# Altium PCB master_pcb.PcbDoc
Units mil, origin at the board's own origin, x right, y up, seen from the top; angles counter-clockwise.
Board outline 6000 x 4000 mil, 2 copper layers (Top Layer, Bottom Layer); 59 components, 0 nets, 299 pads, 45 vias.
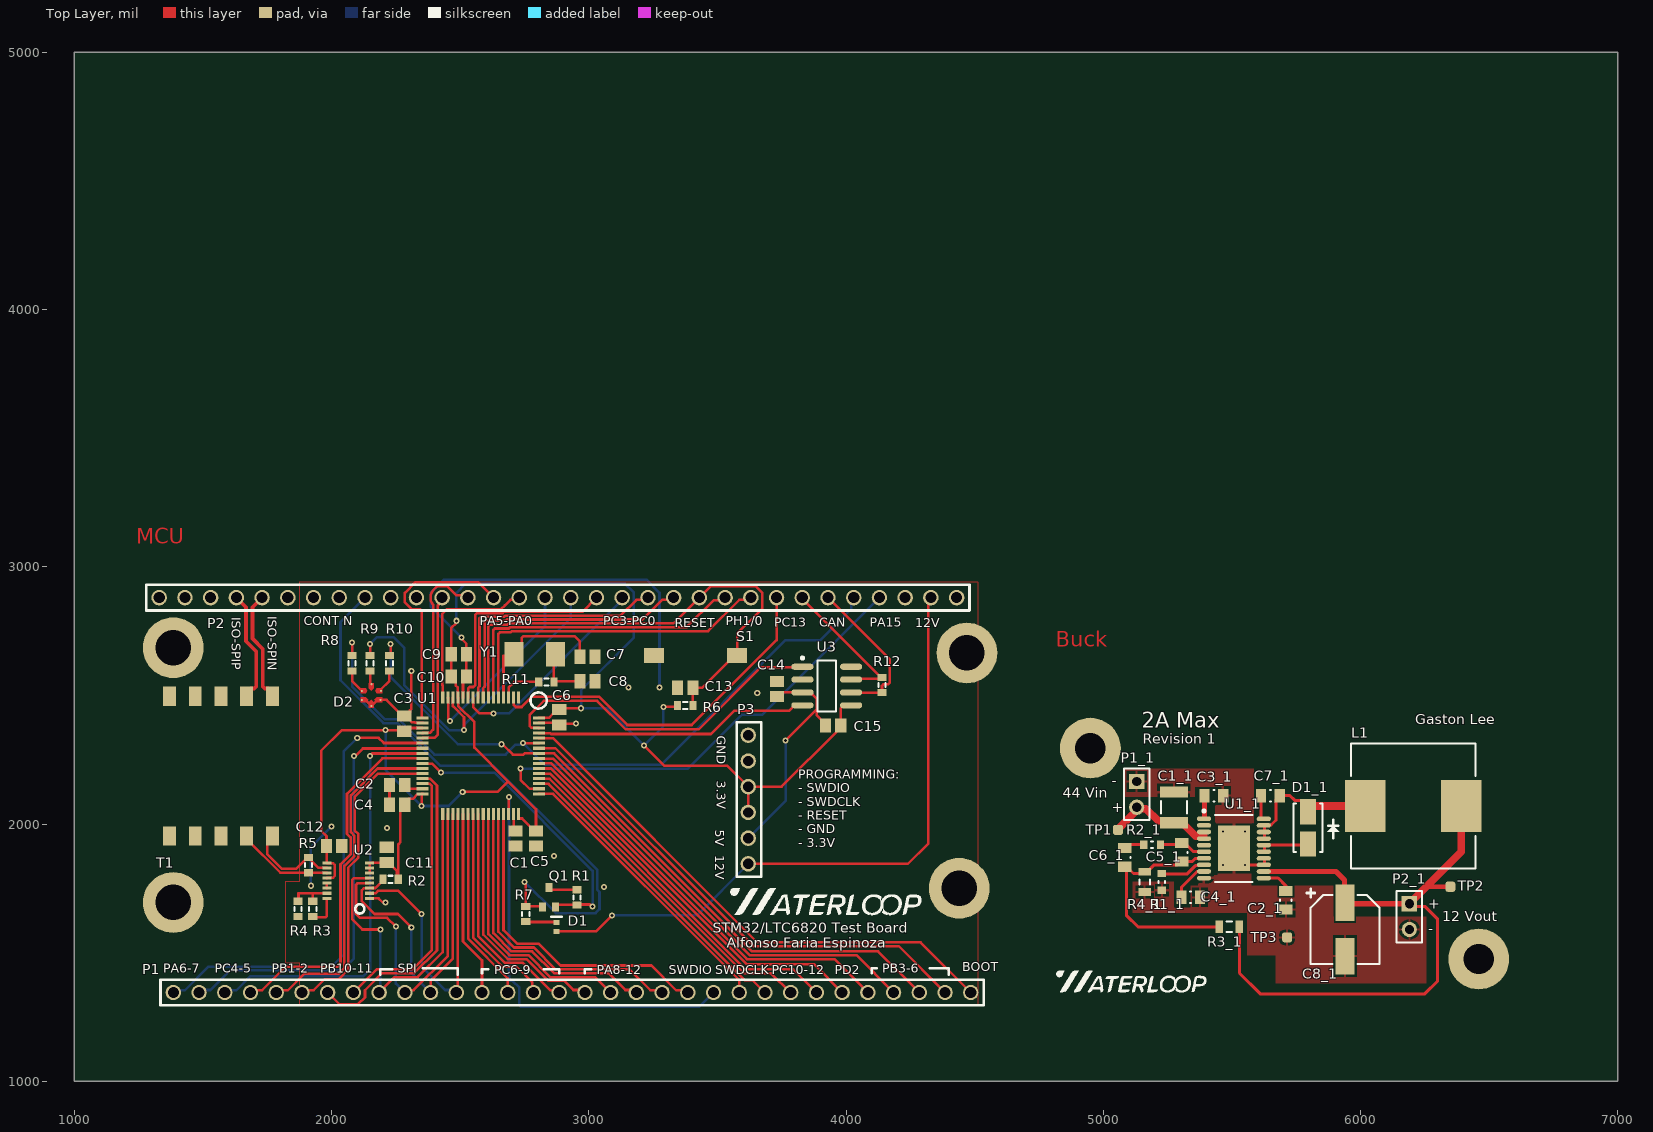
[diagram p0: Top Layer view]
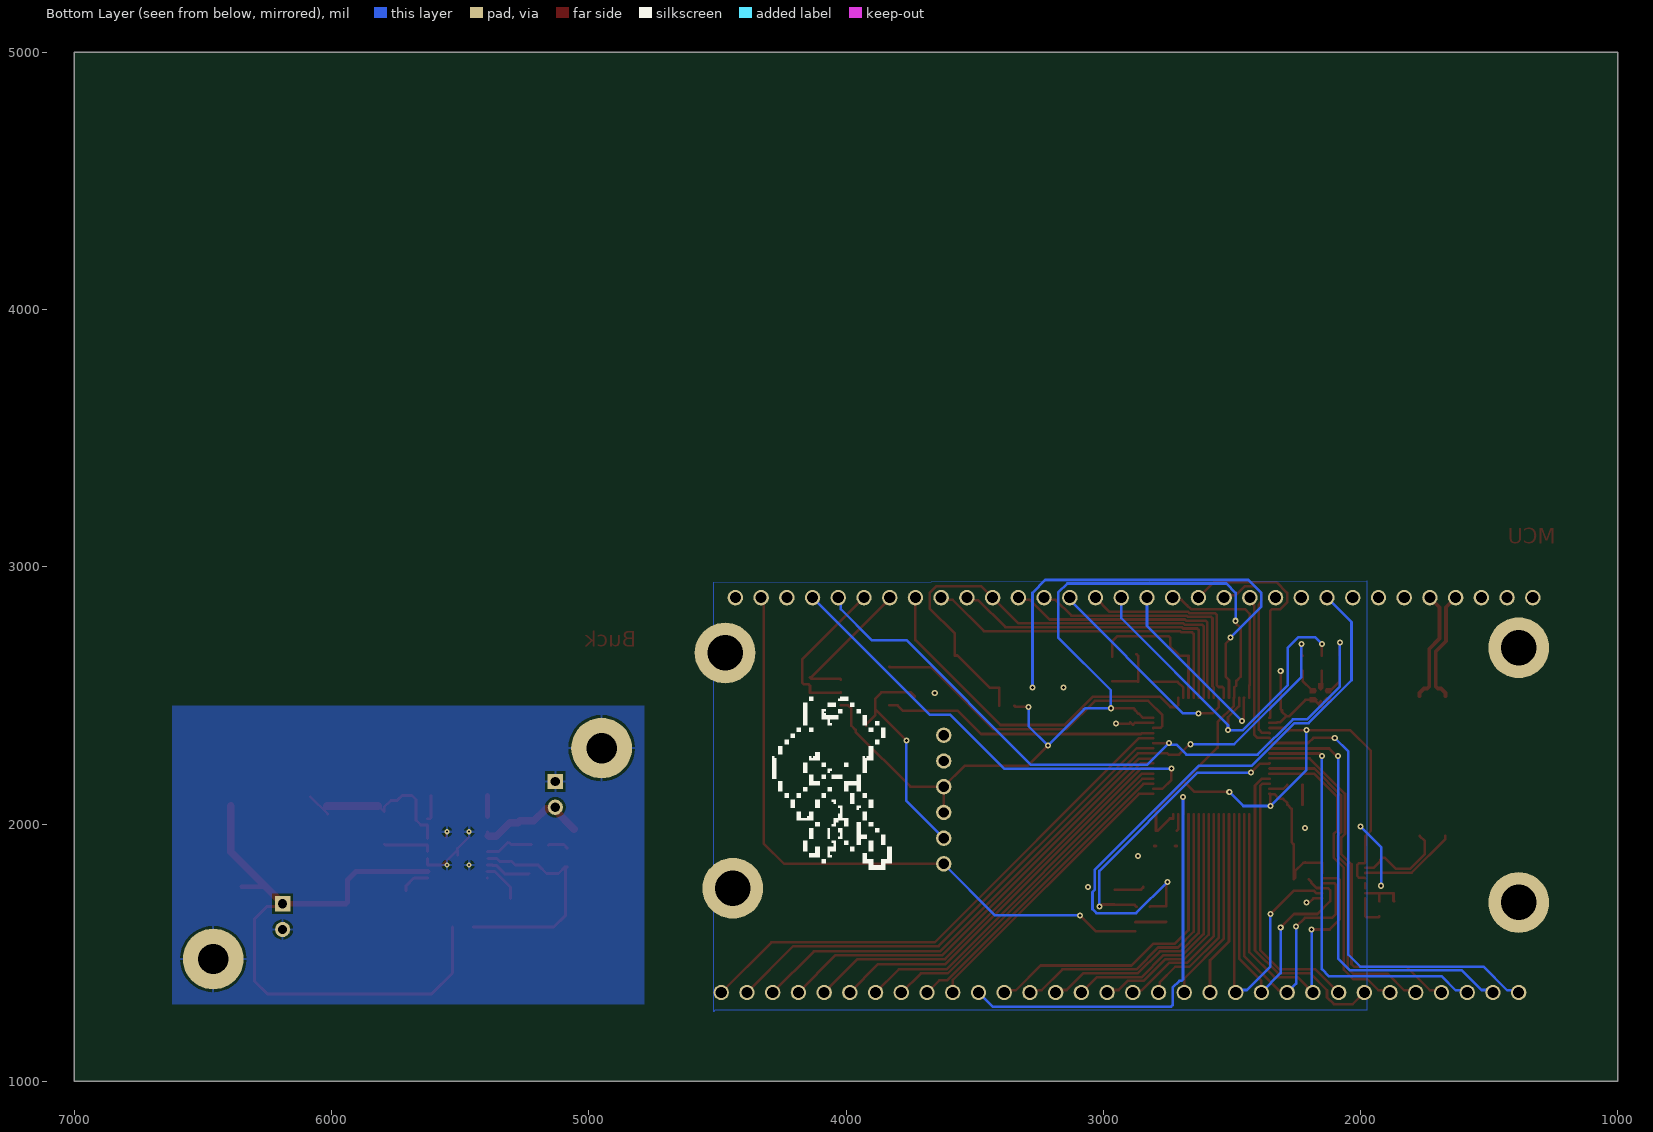
[diagram p1: Bottom Layer view, seen from below]

## Layer stack, top to bottom
Top Solder: solder mask 0.4, Solder Resist, Dk 3.5
Top Layer: signal copper 1.4
Dielectric 1: dielectric 12.6, FR-4, Dk 4.8
Bottom Layer: signal copper 1.4
Bottom Solder: solder mask 0.4, Solder Resist, Dk 3.5

## Board outline
1000,1000 7000,1000 7000,5000 1000,5000

## Design rules (kind name [scope] priority, off if disabled: settings)
Clearance [All] p1: gap=10 ignorepadtopadclearanceinfootprint=FALSE except(0: Arc-Hole Track-Hole SMDPad-Hole THPad-Hole Via-Hole Fill-Hole Poly-Hole Region-Hole Text-Hole)
PolygonConnect [All] p1: connectstyle=Relief reliefconductorwidth=10 reliefentries=4 polygonreliefangle="90 Angle" airgapwidth=10
RoomDefinition Buck_Schematic [InComponentClass('Buck_Schematic')] p1: confinementstyle=ConfineIn formatcopy=TRUE lockcomponents=FALSE outline 4775,1305 6630,1305 6630,2470 4775,2470
RoutingVias [All] p1: holewidth=28 width=50 viastyle="Through Hole" minholewidth=28 minwidth=50 maxholewidth=28 maxwidth=50
SolderMaskExpansion [All] p1: expansion=4 istentingtop=FALSE
Width [All] p1: maxlimit=10 minlimit=10 preferedwidth=10
30 further rules are at their usual default settings.

## Components (designator, comment, footprint, x,y, rotation, side; value= is the part's Value field where it differs from the comment)
C1 "10V" C0805 2715,1943.9 r90 top value=2.2uF
C1_1 "Cin" "1210 - Capacitor" 5275,2065 r270 top value=2.2uF (schematic designator C1)
C2 "10V" C0805 2255,2151.94 r0 top value=2.2uF
C2_1 "Css" "0805 - Capacitor" 5710,1703.58 r90 top value=10nF (schematic designator C2)
C3 "10V" C0805 2282.53,2390 r90 top value=100nF
C3_1 "Cbyp" "0805 - Capacitor" 5430,2110 r180 top value=100nF (schematic designator C3)
C4 "10V" C0805 2255,2075 r180 top value=100nF
C4_1 "Cramp" "0805 - Capacitor" 5340,1715 r180 top value=690pF (schematic designator C4)
C5 "10V" C0805 2795,1943.9 r270 top value=100nF
C5_1 "Ccomp2" "0805 - Capacitor" 5305,1890 r90 top value=51pF (schematic designator C5)
C6 "10V" C0805 2885,2415 r270 top value=100nF
C6_1 "Ccomp1" "0805 - Capacitor" 5083.53,1870 r90 top value=2.7nF (schematic designator C6)
C7 "50V" C0805 2995,2650 r180 top value=4pF
C7_1 "Cboot" "0805 - Capacitor" 5650,2110 r180 top value=22nF (schematic designator C7)
C8 "50V" C0805 2995,2555 r180 top value=4pF
C8_1 "Cout" "OCVZ0606 - CAPACITOR" 5940,1590 r270 top value=39uF (schematic designator C8)
C9 "10V" C0805 2495,2660 r0 top value=10nF
C10 "10V" C0805 2495,2573.06 r180 top value=1uF
C11 "10V" C0805 2215,1880 r90 top value=10nF
C12 "10V" C0805 2010,1915 r0 top value=10nF
C13 "10V" C0805 3375,2530 r180 top value=100nF
C14 "10V" C0805 3732.23,2525.07 r90 top value=100nF
C15 "10V" C0805 3950,2382.75 r180 top value=100nF
D1 "SMLP13BC8TT86" SMLP13BC8TT86 2875,1600 r0 top
D1_1 "Diode - Schottky" "SMA - DIODE" 5795.84,1985 r90 top (schematic designator D1)
D2 "CL-340T-SD-T" CL-340T-SD-T 2155,2500 r0 top
L1 "Inductor" "MSS1210 - INDUCTOR" 6205,2070 r0 top value=68uH
P1 "61303211121" 61303211121 1385,1345 r0 top
P1_1 "1x2 Header" HDR1X2 5130.11,2165 r270 top (schematic designator P1)
P2 "61303211121" 61303211121 1330,2880 r0 top
P2_1 "1x2 Header" HDR1X2 6190,1690 r270 top (schematic designator P2)
P3 "PH1-06-UA" PH1-06-UA 3620,2345 r270 top
Q1 "NVS4409NT1G" NVS4409NT1G 2845,1715 r180 top
R1 "5%" J1-0603 2955,1715 r270 top value=10K
R1_1 "Rt" "0603 - Resistor" 5228.06,1775 r90 top value=20.5k (schematic designator R1)
R2 "1%" J1-0603 2230,1785 r0 top value=3k
R2_1 "Rcomp" "0603 - Resistor" 5190,1920 r0 top value=21.5k (schematic designator R2)
R3 "1%" J1-0603 1926.95,1670 r90 top value=3K
R3_1 "Rfb2" "0805 - Resistor" 5490,1600 r0 top value=8.87k (schematic designator R3)
R4 "1%" J1-0603 1869.7,1670 r270 top value=1K
R4_1 "Rfb1" "0805 - Resistor" 5160.96,1775 r90 top value=1.02k (schematic designator R4)
R5 "1%" J1-0603 1910,1840 r90 top value=120
R6 "5%" J1-0603 3375,2460 r180 top value=10K
R7 "5%" J1-0603 2755,1650 r270 top value=2K
R8 "1%" J1-0603 2080,2625 r90 top value=120R
R9 "1%" J1-0603 2150,2625 r90 top value=120R
R10 "1%" J1-0603 2225,2625 r90 top value=120R
R11 "0603" J1-0603 2835,2552.63 r0 top value=0
R12 "1%" J1-0603 4140,2540 r90 top value=120R
S1 "PTS636 SM43 SMTR LFS" "PTS636 SM43 SMTR LFS" 3415,2655 r180 top
T1 "HM2100NLT" HM2100NLT 1570,2225 r0 top
TP1 "Test Point" "Test Point"#1 5057.37,1977.37 r90 top
TP2 "Test Point" "Test Point"#2 6310,1715 r90 top
TP3 "Test Point" "Test Point"#1 5715,1559.33 r90 top
U1 "STM32F405RGT6TR" STM32F405RGT6TR 2580,2265 r180 top
U1_1 "LM5005" LM5005 5508.06,1905 r0 top (schematic designator U1)
U2 "LTC6820" LTC6820 2065,1780 r90 top
U3 "TJA1051T/3/CM,118" SO8_N 3925.31,2536.46 r0 top
Y1 "CX5032GB08000H0HPQZ1" CX5032GB08000H0HPQZ1 2790,2660 r180 top

## Footprints (in the part's own frame and the unit in brackets; to place one, negate y for a bottom-side part, rotate by r counter-clockwise, add the part's x,y. Pads: shape width x height; smd on the part's side, far side on the other; paste and mask are expansions set on the pad)
"0603 - Resistor" [mm] "0603 Chip Resistor - IPC Medium Density"
  rect 0.7x0.85 smd: 1(-0.825,0) 2(0.825,0)
  silkscreen extent -0.1,-0.33 0.1,0.33, body extent -0.8,-0.4 0.8,0.4, height 0.45
"0805 - Capacitor" [mm] "0805 Chip Capacitor - IPC Medium Density"
  rect 1x1.35 smd: 1(-0.925,0) 2(0.925,0)
  silkscreen extent -0.05,-0.58 0.05,0.58, body extent -1,-0.6 1,0.6, height 1.2
"0805 - Resistor" [mm] "0805 Chip Resistor - IPC Medium Density"
  rect 0.75x1.25 smd: 1(-1,0) 2(1,0)
  silkscreen extent -0.25,-0.53 0.25,0.53, body extent -1,-0.6 1,0.6, height 0.5
"1210 - Capacitor" [mm] "1210 Chip Capacitor - IPC Medium Density"
  rect 1.1x2.75 smd: 1(-1.525,0) 2(1.525,0)
  silkscreen extent -0.6,-1.27 0.6,1.28, body extent -1.65,-1.3 1.65,1.3, height 1.6
61303211121 [mil]
  round 60 hole 43.31: 1(0,0) 2(100,0) 3(200,0) 4(300,0) 5(400,0) 6(500,0) 7(600,0) 8(700,0) 9(800,0) 10(900,0) 11(1000,0) 12(1100,0) 13(1200,0) 14(1300,0) 15(1400,0) 16(1500,0) 17(1600,0) 18(1700,0) 19(1800,0) 20(1900,0) 21(2000,0) 22(2100,0) 23(2200,0) 24(2300,0) 25(2400,0) 26(2500,0) 27(2600,0) 28(2700,0) 29(2800,0) 30(2900,0) 31(3000,0) 32(3100,0)
  silkscreen extent -50,-50 3150,50
C0805 [mm] "Chip Capacitor, Body 2.0x1.3mm, IPC High Density"
  rect 1.1x1.4 smd: 1(-0.75,0) 2(0.75,0)
  body extent -1.1,-0.72 1.1,0.72, height 1.4
CL-340T-SD-T [mm]
  round 0.2 smd: 1(-0.95,0.45) 2(0,1.1) 3(0.95,0.45) 4(0.9,-0.45) 5(0,-1.05) 6(-0.95,-0.45)
  Top Layer region: 0.25,1.2 0.25,0.7 0,0.45 -0.25,0.7 -0.25,1.2
  Top Layer region: -0.25,-1.2 -0.25,-0.7 0,-0.45 0.25,-0.7 0.25,-1.2
  Top Layer region: -1.05,-0.2 -0.55,-0.2 -0.3,-0.45 -0.55,-0.7 -1.05,-0.7
  Top Layer region: 1.05,-0.7 0.55,-0.7 0.3,-0.45 0.55,-0.2 1.05,-0.2
  Top Layer region: -1.05,0.7 -0.55,0.7 -0.4,0.45 -0.55,0.2 -1.05,0.2
  Top Layer region: 1.05,0.2 0.55,0.2 0.4,0.45 0.55,0.7 1.05,0.7
  body extent -0.75,-0.8 0.65,0.9, height 0.35
CX5032GB08000H0HPQZ1 [mm]
  rect 1.9x2.4 smd: 1(-2.05,0) 2(2.05,0)
  body extent -2.5,-1.6 2.5,1.6, height 1.1
HDR1X2 [mm] "Connector; Header; 2 Position"
  rect 1.5x1.5 hole 0.9: 1(0,0)
  round 1.5 hole 0.9: 2(2.54,0)
  silkscreen extent -1.27,-1.27 3.81,1.27, body extent -1.27,-1.27 3.81,1.27, height 8.54
HM2100NLT [mm]
  rect 1.27x1.89 smd: 1(-5.08,-6.895) 2(-2.54,-6.895) 3(0,-6.895) 4(2.54,-6.895) 5(5.08,-6.895) 6(5.08,6.895) 7(2.54,6.895) 8(0,6.895) 9(-2.54,6.895) 10(-5.08,6.895)
  body extent -7.37,-5.84 7.37,5.84, height 3.45
J1-0603 [mm] "Chip Resistor, Body 1.6x0.8mm, IPC High Density"
  rect 0.7x0.9 smd: 1(-0.75,0) 2(0.75,0)
  silkscreen extent -0.2,-0.35 0.2,0.35, body extent -0.85,-0.48 0.85,0.48, height 0.9
LM5005 [mm] "20-PowerTSSOP (0.173\"\", 4.40mm Width)"
  oval 1.4x0.45 smd: 1(-2.95,2.925) 2(-2.95,2.275) 3(-2.95,1.625) 4(-2.95,0.975) 5(-2.95,0.325) 6(-2.95,-0.325) 7(-2.95,-0.975) 8(-2.95,-1.625) 9(-2.95,-2.275) 10(-2.95,-2.925) 11(2.95,-2.925) 12(2.95,-2.275) 13(2.95,-1.625) 14(2.95,-0.975) 15(2.95,-0.325) 16(2.95,0.325) 17(2.95,0.975) 18(2.95,1.625) 19(2.95,2.275) 20(2.95,2.925)
  rect 3.15x4.5 smd: 21(0,0)
  silkscreen extent -3.07,-3.3 1.85,3.82, body extent -3.2,-3.3 3.2,3.3, height 1.1
LTC6820 [mm]
  rect 0.305x0.889 smd: 1(-1.75,-2.106) 2(-1.25,-2.106) 3(-0.75,-2.106) 4(-0.25,-2.106) 5(0.25,-2.106) 6(0.75,-2.106) 7(1.25,-2.106) 8(1.75,-2.106) 9(1.75,2.106) 10(1.25,2.106) 11(0.75,2.106) 12(0.25,2.106) 13(-0.25,2.106) 14(-0.75,2.106) 15(-1.25,2.106) 16(-1.75,2.106)
  silkscreen extent -3.25,-1.6 -2.34,-0.69, body extent -2.03,-1.52 2.03,1.52, height 1.1
"MSS1210 - INDUCTOR" [mm] "Precision Wire Wound Inductor, 2-Leads, Body 12.00x12.00mm, IPC Medium Density"
  rect 4x5.1 smd: 1(-4.75,0) 2(4.75,0)
  silkscreen extent -6.15,-6.15 6.15,6.15, body extent -6.15,-6.15 6.15,6.15, height 10.16
NVS4409NT1G [mm]
  rect 0.7x0.9 smd: 1(0.65,0.95) 2(-0.65,0.95) 3(0,-0.95)
  body extent -1.05,-0.62 1.05,0.62, height 0.9
"OCVZ0606 - CAPACITOR" [mm] "Aluminum Electrolytic Capacitor, Body 6.60x6.60x6.00mm, IPC Low Density"
  rect 3.6x1.85 smd: 1(-2.625,0) 2(2.625,0)
  silkscreen extent -4,-3.8 3.4,3.4, body extent -3.6,-3.4 3.6,3.4, height 6
PH1-06-UA [mil]
  round 60 hole 40.16: 1(0,0) 2(100,0) 3(200,0) 4(300,0) 5(400,0) 6(500,0)
  silkscreen extent -50,-45 550,50
"PTS636 SM43 SMTR LFS" [mm]
  rect 2x1.5 smd: 1(-4.1,0) 2(4.1,0)
  body extent -3,-1.75 3,1.75, height 4.3
"SMA - DIODE" [mm] "Molded Diode, 2-Leads, Body 4.38x2.63mm, IPC Medium Density"
  rect 2.5x1.6 smd: 1(-1.6,0) 2(1.6,0)
  silkscreen extent -2.4,-3.1 2.4,1.45, body extent -2.6,-1.43 2.6,1.43, height 2.95
SMLP13BC8TT86 [mm]
  rect 0.6x0.5 smd: 1(0,-0.45) 2(0,0.45)
  silkscreen extent -0.51,1.02 0.51,1.02, body extent -0.3,-0.5 0.3,0.5, height 0.2
SO8_N [mm] "SOIC, 8-Leads, Body 4.9x3.9mm, Pitch 1.27mm, IPC Medium Density"
  oval 2.2x0.6 smd: 1(-2.4,1.905) 2(-2.4,0.635) 3(-2.4,-0.635) 4(-2.4,-1.905) 5(2.4,-1.905) 6(2.4,-0.635) 7(2.4,0.635) 8(2.4,1.905)
  silkscreen extent -2.52,-2.5 0.9,2.88, body extent -2,-2.5 2,2.5, height 1.75
STM32F405RGT6TR [mm]
  rect 0.3x1.2 smd: 1(-3.75,-5.75) 2(-3.25,-5.75) 3(-2.75,-5.75) 4(-2.25,-5.75) 5(-1.75,-5.75) 6(-1.25,-5.75) 7(-0.75,-5.75) 8(-0.25,-5.75) 9(0.25,-5.75) 10(0.75,-5.75) 11(1.25,-5.75) 12(1.75,-5.75) 13(2.25,-5.75) 14(2.75,-5.75) 15(3.25,-5.75) 16(3.75,-5.75) 33(3.75,5.75) 34(3.25,5.75) 35(2.75,5.75) 36(2.25,5.75) 37(1.75,5.75) 38(1.25,5.75) 39(0.75,5.75) 40(0.25,5.75) 41(-0.25,5.75) 42(-0.75,5.75) 43(-1.25,5.75) 44(-1.75,5.75) 45(-2.25,5.75) 46(-2.75,5.75) 47(-3.25,5.75) 48(-3.75,5.75)
  rect 1.2x0.3 smd: 17(5.75,-3.75) 18(5.75,-3.25) 19(5.75,-2.75) 20(5.75,-2.25) 21(5.75,-1.75) 22(5.75,-1.25) 23(5.75,-0.75) 24(5.75,-0.25) 25(5.75,0.25) 26(5.75,0.75) 27(5.75,1.25) 28(5.75,1.75) 29(5.75,2.25) 30(5.75,2.75) 31(5.75,3.25) 32(5.75,3.75) 49(-5.75,3.75) 50(-5.75,3.25) 51(-5.75,2.75) 52(-5.75,2.25) 53(-5.75,1.75) 54(-5.75,1.25) 55(-5.75,0.75) 56(-5.75,0.25) 57(-5.75,-0.25) 58(-5.75,-0.75) 59(-5.75,-1.25) 60(-5.75,-1.75) 61(-5.75,-2.25) 62(-5.75,-2.75) 63(-5.75,-3.25) 64(-5.75,-3.75)
  silkscreen extent -6.52,-6.26 -4.92,-4.66, body extent -4.83,-4.89 4.83,4.89, height 1.6
"Test Point"#1 [mm] "Test Point"
  rrect50% 1x1 smd: TP?(0,0)
"Test Point"#2 [mm] "Test Point"
  rrect50% 1x1 smd: TP?(1.046,-1)

## Part data
C1 C2: library part Cap, "C0805C225K8RACAUTO. 2.2µF ±10% 10V Ceramic Capacitor X7R 0805 (2012 Metric)", LatestRevisionDate=17-Jul-2002, LatestRevisionNote="Re-released for DXP Platform.", PackageDescription="Radial Cap, Thru-Hole; 2 Leads; 0.3 in Pin Spacing", PackageReference=RAD-0.3, Published=8-Jun-2000, Publisher="Altium Limited"
C1_1: library part "Capacitor - Nonpolarized", "Nonpolarized Capacitor", Supplier Part Number 1=445-4497-1-ND, Supplier 1=Digi-Key
C2_1: library part "Capacitor - Nonpolarized", "Nonpolarized Capacitor", Supplier Part Number 1=311-1475-1-ND, Supplier 1=Digi-Key
C3 C4 C5 C6 C13 C14 C15: library part Cap, "C0805C104K8RACTU. 0.1µF ±10% 10V Ceramic Capacitor X7R 0805 (2012 Metric)", LatestRevisionDate=17-Jul-2002, LatestRevisionNote="Re-released for DXP Platform.", PackageDescription="Radial Cap, Thru-Hole; 2 Leads; 0.3 in Pin Spacing", PackageReference=RAD-0.3, Published=8-Jun-2000, Publisher="Altium Limited"
C3_1: library part "Capacitor - Nonpolarized", "Nonpolarized Capacitor", Supplier Part Number 1=311-2083-1-ND, Supplier 1=Digi-Key
C4_1: library part "Capacitor - Nonpolarized", "Nonpolarized Capacitor", Supplier Part Number 1=311-4308-1-ND, Supplier 1=Digi-Key
C5_1 C6_1: library part "Capacitor - Nonpolarized", "Nonpolarized Capacitor", Supplier Part Number 1=311-1130-1-ND, Supplier 1=Digi-Key
C7: library part Cap, "CBR08C409B5GAC. 4pF ±0.1pF 50V Ceramic Capacitor C0G, NP0 0805 (2012 Metric)", LatestRevisionDate=17-Jul-2002, LatestRevisionNote="Re-released for DXP Platform.", PackageDescription="Radial Cap, Thru-Hole; 2 Leads; 0.3 in Pin Spacing", PackageReference=RAD-0.3, Published=8-Jun-2000, Publisher="Altium Limited"
C7_1: library part "Capacitor - Nonpolarized", "Nonpolarized Capacitor", Supplier Part Number 1=311-1905-1-ND, Supplier 1=Digi-Key
C8: library part Cap, "CBR08C409B5GAC", LatestRevisionDate=17-Jul-2002, LatestRevisionNote="Re-released for DXP Platform.", PackageDescription="Radial Cap, Thru-Hole; 2 Leads; 0.3 in Pin Spacing", PackageReference=RAD-0.3, Published=8-Jun-2000, Publisher="Altium Limited"
C8_1: library part "Capacitor - Polarized", "Polarized Capacitor", Supplier Part Number 1=PCE3804CT-ND, Supplier 1=Digi-Key
C9 C11 C12: library part Cap, "C0805C103K8RAC7800. 10000pF ±10% 10V Ceramic Capacitor X7R 0805 (2012 Metric)", LatestRevisionDate=17-Jul-2002, LatestRevisionNote="Re-released for DXP Platform.", PackageDescription="Radial Cap, Thru-Hole; 2 Leads; 0.3 in Pin Spacing", PackageReference=RAD-0.3, Published=8-Jun-2000, Publisher="Altium Limited"
C10: library part Cap, "CL21B105KPFNNNE. 1µF ±10% 10V Ceramic Capacitor X7R 0805 (2012 Metric)", LatestRevisionDate=17-Jul-2002, LatestRevisionNote="Re-released for DXP Platform.", PackageDescription="Radial Cap, Thru-Hole; 2 Leads; 0.3 in Pin Spacing", PackageReference=RAD-0.3, Published=8-Jun-2000, Publisher="Altium Limited"
D1: library part LED2, "Blue 470nm LED Indication - Discrete 2.9V 2-SMD, No Lead", LatestRevisionDate=17-Jul-2002, LatestRevisionNote="Re-released for DXP Platform.", PackageDescription="SM LED; 2 Flat Leads", PackageReference=3.2X1.6X1.1, PackageVersion=Feb-2002, Published=8-Jun-2000, Publisher="Altium Limited"
D1_1: "Schottky Rectifier", Manufacturer Part Number=SK220ATR, Supplier Part Number 1=1655-2135-1-ND, ComponentLink1Description="Manufacturer Link", ComponentLink1URL=http://www.irf.com/, ComponentLink2Description=Datasheet, ComponentLink2URL=http://www.irf.com/product-info/datasheets/data/10tq.pdf, Supplier 1=Digi-Key
L1: Supplier Part Number 1=994-MSS1210-683MEB, Supplier 1=Mouser
P1_1 P2_1: "1x2 Pin Header"
P3: library part "Header 6", "Connector Header Through Hole 6 position 0.100\" (2.54mm)", LatestRevisionDate=17-Jul-2002, LatestRevisionNote="Re-released for DXP Platform.", Publisher="Altium Limited"
Q1: library part MOSFET-N, "N-Channel 25V 700mA (Ta) 280mW (Tj) Surface Mount SC-70-3 (SOT323)", LatestRevisionDate=17-Jul-2002, LatestRevisionNote="Re-released for DXP Platform.", PackageDescription="TO, Flat Index; 3 In-Line, Axial Leads; Body Dia. 4.6mm; Lead Dia. 0.5 mm (max)", PackageReference=E3, PackageVersion=1995/1996, Published=8-Jun-2000, Publisher="Altium Limited"
R1 R6: library part Res1, "ERJ-3GEYJ103V. 10 kOhms ±5% 0.1W, 1/10W Chip Resistor 0603 (1608 Metric) Automotive AEC-Q200 Thick Film", LatestRevisionDate=17-Jul-2002, LatestRevisionNote="Re-released for DXP Platform.", PackageDescription="Axial Device, Thru-Hole; 2 Leads; 0.3 in Pin Spacing", PackageReference=AXIAL-0.3, Published=8-Jun-2000, Publisher="Altium Limited"
R1_1: library part Resistor, "Resistor", Supplier Part Number 1=541-20.5KHCT-ND, Supplier 1=Digi-Key
R2 R3: library part Res1, "RMCF0603FT3K00. 3 kOhms ±1% 0.1W, 1/10W Chip Resistor 0603 (1608 Metric) Automotive AEC-Q200 Thick Film", LatestRevisionDate=17-Jul-2002, LatestRevisionNote="Re-released for DXP Platform.", PackageDescription="Axial Device, Thru-Hole; 2 Leads; 0.3 in Pin Spacing", PackageReference=AXIAL-0.3, Published=8-Jun-2000, Publisher="Altium Limited"
R2_1: library part Resistor, "Resistor", Supplier Part Number 1=541-21.5KHCT-ND, Supplier 1=Digi-Key
R3_1: library part Resistor, "Resistor", Supplier Part Number 1=P8.87KCCT-ND, Supplier 1=Digi-Key
R4: library part Res1, "RC0603FR-071KL .1 kOhms ±1% 0.1W, 1/10W Chip Resistor 0603 (1608 Metric) Moisture Resistant Thick Film", LatestRevisionDate=17-Jul-2002, LatestRevisionNote="Re-released for DXP Platform.", PackageDescription="Axial Device, Thru-Hole; 2 Leads; 0.3 in Pin Spacing", PackageReference=AXIAL-0.3, Published=8-Jun-2000, Publisher="Altium Limited"
R4_1: library part Resistor, "Resistor", Supplier Part Number 1=P1.02KCCT-ND, Supplier 1=Digi-Key
R5 R8 R9 R10 R12: library part Res1, "RC0603FR-07120RL. 120 Ohms ±1% 0.1W, 1/10W Chip Resistor 0603 (1608 Metric) Moisture Resistant Thick Film", LatestRevisionDate=17-Jul-2002, LatestRevisionNote="Re-released for DXP Platform.", PackageDescription="Axial Device, Thru-Hole; 2 Leads; 0.3 in Pin Spacing", PackageReference=AXIAL-0.3, Published=8-Jun-2000, Publisher="Altium Limited"
R7: library part Res1, "ERJ-PA3J202V. 2 kOhms ±5% 0.25W, 1/4W Chip Resistor 0603 (1608 Metric) Automotive AEC-Q200, Pulse Withstanding Thick Film", LatestRevisionDate=17-Jul-2002, LatestRevisionNote="Re-released for DXP Platform.", PackageDescription="Axial Device, Thru-Hole; 2 Leads; 0.3 in Pin Spacing", PackageReference=AXIAL-0.3, Published=8-Jun-2000, Publisher="Altium Limited"
R11: library part Res1, "ERJ-U030R00V. 0 Ohms Jumper 0.1W, 1/10W Chip Resistor 0603 (1608 Metric) Anti-Sulfur, Automotive AEC-Q200 Thick Film", LatestRevisionDate=17-Jul-2002, LatestRevisionNote="Re-released for DXP Platform.", PackageDescription="Axial Device, Thru-Hole; 2 Leads; 0.3 in Pin Spacing", PackageReference=AXIAL-0.3, Published=8-Jun-2000, Publisher="Altium Limited"
S1: library part SW-PB, "Tactile Switch SPST-NO Top Actuated Surface Mount", LatestRevisionDate=17-Jul-2002, LatestRevisionNote="Re-released for DXP Platform.", PackageDescription="Switch; 2 Leads", PackageReference=SPST-2, Published=24-Mar-1999, Publisher="Altium Limited"
U1_1: "7V to 75V 2.5A, Buck Converter", Manufacturer="Texas Instruments", Manufacturer Part Number=LM5005MHX/NOPB, Supplier Part Number=926-LM5005MHX/NOPB, Supplier Part Number 1=LM5005MHX/NOPBCT-ND, Datasheet=https://www.ti.com/lit/ds/symlink/lm5005.pdf?HQS=TI-null-null-digikeymode-df-pf-null-wwe&ts=1606456124909, Supplier=Mouser, Supplier 1=Digi-Key
U3: library part TJA1050T/CM,118
Y1: library part XTAL, "8MHz ±20ppm Crystal 12pF 300 Ohms 2-SMD, No Lead", LatestRevisionDate=17-Jul-2002, LatestRevisionNote="Re-released for DXP Platform.", PackageDescription="Crystal, Thru-Hole; 2 Leads; Body 3.1 x 8.2 mm (Dia.xH)", PackageReference=R38, Published=8-Jun-2000, Publisher="Altium Limited"

## Free pads (board coordinates)
  round 236.22 hole 118.11: 1(4950,2295) 2(6460,1475)
  round 236.22 hole 137.8 unplated: 12(1385,2685) 13(1385,1695) 14(4470,2665) 15(4440,1750)

## Via types
v1: diameter 23.62, hole 11.81, Top Layer to Bottom Layer, 41 vias
v2: diameter 19.68, hole 7.87, Top Layer to Bottom Layer, 4 vias

## Nets (pads, with @x,y where several pads share a name; then routed paths per layer and width w, separated by ;. In a path a pad name is that pad's centre, name@x,y a point inside that pad or via, vN(x,y) a via of type N, cw(c..) or ccw(c..) an arc to the next point about the centre after c; other vN are vias at no path point)
pads on no net: C1.1 C1.2 C1_1.1 C1_1.2 C2.1 C2.2 C2_1.1 C2_1.2 C3.1 C3.2 C3_1.1 C3_1.2 C4.1 C4.2 C4_1.1 C4_1.2 C5.1 C5.2 C5_1.1 C5_1.2 C6.1 C6.2 C6_1.1 C6_1.2 C7.1 C7.2 C7_1.1 C7_1.2 C8.1 C8.2 C8_1.1 C8_1.2 C9.1 C9.2 C10.1 C10.2 C11.1 C11.2 C12.1 C12.2 C13.1 C13.2 C14.1 C14.2 C15.1 C15.2 D1.1 D1.2 D1_1.1 D1_1.2 D2.1 D2.2 D2.3 D2.4 D2.5 D2.6 L1.1 L1.2 P1.1 P1.2 P1.3 P1.4 P1.5 P1.6 P1.7 P1.8 P1.9 P1.10 P1.11 P1.12 P1.13 P1.14 P1.15 P1.16 P1.17 P1.18 P1.19 P1.20 P1.21 P1.22 P1.23 P1.24 P1.25 P1.26 P1.27 P1.28 P1.29 P1.30 P1.31 P1.32 P1_1.1 P1_1.2 P2.1 P2.2 P2.3 P2.4 P2.5 P2.6 P2.7 P2.8 P2.9 P2.10 P2.11 P2.12 P2.13 P2.14 P2.15 P2.16 P2.17 P2.18 P2.19 P2.20 P2.21 P2.22 P2.23 P2.24 P2.25 P2.26 P2.27 P2.28 P2.29 P2.30 P2.31 P2.32 P2_1.1 P2_1.2 P3.1 P3.2 P3.3 P3.4 P3.5 P3.6 Q1.1 Q1.2 Q1.3 R1.1 R1.2 R1_1.1 R1_1.2 R2.1 R2.2 R2_1.1 R2_1.2 R3.1 R3.2 R3_1.1 R3_1.2 R4.1 R4.2 R4_1.1 R4_1.2 R5.1 R5.2 R6.1 R6.2 R7.1 R7.2 R8.1 R8.2 R9.1 R9.2 R10.1 R10.2 R11.1 R11.2 R12.1 R12.2 S1.1 S1.2 T1.1 T1.2 T1.3 T1.4 T1.5 T1.6 T1.7 T1.8 T1.9 T1.10 TP1.TP? TP2.TP? TP3.TP? U1.1 U1.2 U1.3 U1.4 U1.5 U1.6 U1.7 U1.8 U1.9 U1.10 U1.11 U1.12 U1.13 U1.14 U1.15 U1.16 U1.17 U1.18 U1.19 U1.20 U1.21 U1.22 U1.23 U1.24 U1.25 U1.26 U1.27 U1.28 U1.29 U1.30 U1.31 U1.32 U1.33 U1.34 U1.35 U1.36 U1.37 U1.38 U1.39 U1.40 U1.41 U1.42 U1.43 U1.44 U1.45 U1.46 U1.47 U1.48 U1.49 U1.50 U1.51 U1.52 U1.53 U1.54 U1.55 U1.56 U1.57 U1.58 U1.59 U1.60 U1.61 U1.62 U1.63 U1.64 U1_1.1 U1_1.2 U1_1.3 U1_1.4 U1_1.5 U1_1.6 U1_1.7 U1_1.8 U1_1.9 U1_1.10 U1_1.11 U1_1.12 U1_1.13 U1_1.14 U1_1.15 U1_1.16 U1_1.17 U1_1.18 U1_1.19 U1_1.20 U1_1.21 U2.1 U2.2 U2.3 U2.4 U2.5 U2.6 U2.7 U2.8 U2.9 U2.10 U2.11 U2.12 U2.13 U2.14 U2.15 U2.16 U3.1 U3.2 U3.3 U3.4 U3.5 U3.6 U3.7 U3.8 Y1.1 Y1.2
copper on no net: | length 93126.6
  Top Layer w10: 1670,1953.54 1670,1941.34 1800.87,1810.47 1910,1810.47 1910.47,1810 1981.61,1810 1982.09,1809.53 ; 1685,1345 1693.64,1353.64 1730,1353.64 1821.36,1445 2025,1445 2035,1455 2035,1843.05 2074.06,1882.11 2074.06,1947.89 2060,1961.95 2060,2117.43 2197.73,2255.16 2353.62,2255.16 ; 1770,1953.54 1750,1933.54 1750,1882.55 1807.08,1825.47 1862.01,1825.47 1906.06,1869.53 1910,1869.53 ; 1785,1345 1793.64,1353.64 1830,1353.64 1893.64,1417.28 2027.28,1417.28 2050,1440 2050,1836.84 2089.06,1875.9 2089.06,1954.1 2075,1968.16 2075,2111.21 2179.57,2215.79 2353.62,2215.79 ; 1869.7,1699.53 1871.65,1701.47 1871.65,1730.79 1926.87,1730.79 ; 1885,1345 1893.64,1353.64 1930,1353.64 1973.64,1397.28 2028.5,1397.28 2065,1433.79 2065,1830.63 2104.06,1869.68 2104.06,1960.32 2090,1974.37 2090,2105 2181.1,2196.1 2353.62,2196.1 ; 1913.94,1869.53 1922.72,1860.75 1922.72,1856.08 1949.59,1829.21 1982.09,1829.21 ; 1926.95,1640.47 1930.34,1637.09 1976.23,1637.09 1982.09,1642.94 1982.09,1711.1 ; 1926.95,1699.53 1926.87,1699.62 1926.87,1730.79 ; 1982.09,1730.79 1926.87,1730.79 ; 1982.09,1750.47 1982.09,1770.16 ; 1982.09,1789.84 1982.89,1790.65 2004.92,1790.65 2012.46,1798.19 2012.46,1840.55 2004.92,1848.09 1982.89,1848.09 1982.09,1848.9 1982.09,1913.39 1980.47,1915 1980.47,1952.96 1960,1973.43 1960,2285 2040,2365 v1(2210,2365) 2278,2365 2282.53,2360.47 2295.32,2373.27 2353.62,2373.27 ; 1985,1345 2030,1300 2103.64,1300 2130,1326.36 2130,1353.64 2196.36,1420 2321.21,1420 2410,1508.79 2410,2149.62 2384.1,2175.51 2354.53,2175.51 2353.62,2176.42 ; 2080,2595.47 2080,2555.32 2117.6,2517.72 ; 2080,2654.53 v1(2080,2705) ; 2085,1345 2175,1435 2315,1435 2390.12,1510.12 2390.12,2148.29 2382.58,2155.83 2354.53,2155.83 2353.62,2156.73 ; v1(2086.72,2265) 2093.43,2265 2122.05,2293.62 2352.72,2293.62 2353.62,2294.53 ; v1(2100,2335) 2183.22,2335 2203.22,2315 2352.83,2315 2353.62,2314.21 ; 2117.6,2482.28 2131.38,2482.28 2155,2458.66 2178.62,2482.28 2190.43,2482.28 2213.86,2482.28 2276.62,2419.53 2282.53,2419.53 2288.43,2419.53 ; 2147.91,1711.1 2183.07,1711.1 2199.18,1695 v1(2210,1695) ; 2147.91,1730.79 2148.72,1731.59 2172.27,1731.59 2180.68,1740 2260,1740 v1(2350,1650) ; 2147.91,1770.16 2147.11,1769.35 2100.86,1769.35 2095,1763.49 2095,1650 2110,1635 2216.03,1635 v1(2250,1601.03) ; 2147.91,1789.84 2147.11,1789.04 2085.86,1789.04 2080,1783.18 2080,1630 2120,1590 v1(2190,1590) ; 2147.91,1809.53 2147.91,1829.21 2147.91,1848.9 2222.48,1848.9 ; v1(2150,2265) 2158.94,2273.94 2352.72,2273.94 2353.62,2274.84 ; 2150,2595.47 2150,2548.31 2155,2543.31 ; 2150,2654.53 v1(2150,2700) ; 2185,1345 2245,1405 2335,1405 2432.36,1502.36 2432.36,2038.62 ; 2189.45,2520.67 2225,2556.21 2225,2595.47 ; 2200.47,1785 2191.69,1776.22 2191.69,1772.23 2170.75,1751.28 2148.72,1751.28 2147.91,1750.47 2147.11,1749.67 2125.08,1749.67 2117.54,1742.12 2117.54,1699.77 2167.31,1650 2257.76,1650 v1(2310,1597.76) ; 2215,1850.47 2216.57,1848.9 2222.48,1848.9 ; 2225,2654.53 2230,2659.53 v1(2230,2700) ; 2225.47,2075 2225.47,2151.94 ; 2284.53,2151.94 2299.42,2137.05 2353.62,2137.05 ; 2285,1345 2294.32,1354.32 2319.32,1354.32 2452.05,1487.05 2452.05,2038.62 ; v1(2310,2595) 2310,2447 2305.08,2442.09 2305.08,2436.18 2288.43,2419.53 ; v1(2350,2070) 2350,2116.46 2350.91,2117.36 ; 2353.62,2117.36 2352.72,2116.46 2335,2116.46 2316.1,2097.56 2301.18,2097.56 2284.53,2080.91 2284.53,2075 2267.87,2058.35 2267.87,1929.25 2259.53,1920.91 2259.53,1785 2253.66,1790.87 2253.66,1817.72 2222.48,1848.9 ; 2353.62,2235.47 2354.53,2234.57 2390.43,2234.57 v1(2425,2200) ; 2353.62,2333.9 2354.53,2334.8 2399.8,2334.8 2413.58,2348.58 2413.58,2850.05 2430,2866.47 2430,2880 ; 2353.62,2353.58 2354.53,2354.49 2382.58,2354.49 2395,2366.91 2395,2851.72 cw(c2430,2880) 2395,2908.28 2395,2908.64 2411.36,2925 2448.64,2925 2485,2888.64 2521.36,2888.64 2530,2880 ; 2353.62,2392.95 2352.72,2393.86 2324.67,2393.86 2323.53,2395 2312.96,2395 2288.43,2419.53 ; 2353.62,2412.64 2350.91,2412.64 2350,2413.54 2350,2829.14 2344.14,2835 2311.36,2835 2285,2861.36 2285,2898.64 2326.36,2940 2570,2940 2630,2880 ; 2385,1345 2385,1390 2471.73,1476.73 2471.73,2038.62 ; 2432.36,2491.38 2432.36,2538.75 2430.94,2540.17 2430.94,2817.31 2448.64,2835 2658.58,2835 2673.58,2850 2673.93,2850 2695.29,2871.36 2721.36,2871.36 2730,2880 ; 2452.05,2491.38 2452.95,2490.47 2452.95,2407.05 v1(2460,2400) ; 2471.73,2491.38 2471.73,2458.27 2515,2415 v1(2515,2365) ; 2485,1345 2490.51,1350.51 2490.51,2037.72 2491.42,2038.62 ; v1(2485,2790) 2485,2782.05 2465,2762.05 2465,2708.43 2465.47,2707.96 2465.47,2660 2465.47,2573.06 2482.13,2556.41 2482.13,2539.29 2491.42,2530 2491.42,2491.38 2492.32,2490.47 2492.32,2458.89 2555,2396.21 2555,2296.57 2685.78,2165.78 ; v1(2505,2725) 2505,2720.19 2524.53,2700.66 2524.53,2660 2524.53,2573.06 2511.1,2559.64 2511.1,2491.38 2512.01,2490.47 ; v1(2510,2125) 2645,2125 2685.78,2165.78 ; 2511.1,2038.62 2511.1,1543.9 2585,1470 2585,1345 ; 2530.79,2038.62 2530.79,1554.21 2685,1400 2685,1345 ; 2530.79,2491.38 2530.79,2526.77 2536.65,2532.63 2551.51,2532.63 2559.06,2540.17 2559.06,2814.14 2564.91,2820 2664.79,2820 2669.79,2825 2975,2825 3030,2880 ; 2550.47,2038.62 2550.47,1559.53 2665,1445 2720,1445 2780.86,1384.14 2780.86,1349.14 2785,1345 ; 2550.47,2491.38 2550.47,2454.78 2575.25,2430 v1(2630,2430) ; 2570.16,2038.62 2570.16,1564.84 2675,1460 2743.79,1460 2849.47,1354.32 2875.68,1354.32 2885,1345 ; 2570.16,2491.38 2570.16,2530.06 2575.18,2535.08 2575.18,2799.14 2581.04,2805 2671,2805 2676,2810 3123.64,2810 3185,2871.36 3221.36,2871.36 3230,2880 ; 2589.84,2038.62 2589.84,1570.16 2685,1475 2758.79,1475 2843.79,1390 2905,1390 2940.43,1354.57 2975.43,1354.57 2985,1345 ; 2589.84,2491.38 2589.84,2528.53 2595,2533.69 2595,2784.14 2600.86,2790 2677.22,2790 2682.22,2795 3208.64,2795 3285,2871.36 3321.36,2871.36 3330,2880 ; 2609.53,2038.62 2609.53,1571.69 2691.21,1490 2765,1490 2850,1405 3025,1405 3085,1345 ; 2609.53,2491.38 2609.53,2527 2610,2527.47 2610,2769.14 2615.86,2775 2683.43,2775 2688.43,2780 3330,2780 3430,2880 3475,2925 3648.64,2925 3675,2898.64 3675,2838.38 3576.42,2739.79 3576.42,2655 3566.57,2655 3441.57,2530 3404.53,2530 3404.53,2460 ; 2629.21,2038.62 2629.21,1575.79 2700,1505 2780,1505 2865,1420 3076.47,1420 3141.9,1354.57 3175.43,1354.57 3185,1345 ; 2629.21,2491.38 2629.21,2754.14 2635.07,2760 2689.64,2760 2694.64,2765 3380.74,2765 3486.17,2870.43 3520.43,2870.43 3530,2880 ; 2648.9,2038.62 2648.9,1581.1 2710,1520 2786.21,1520 2871.21,1435 3158.64,1435 3240,1353.64 3276.36,1353.64 3285,1345 ; 2648.9,2491.38 2648.9,2739.14 2654.76,2745 2695.86,2745 2700.86,2750 3463.64,2750 3585,2871.36 3621.36,2871.36 3630,2880 ; v1(2660,2310) 2665,2310 2705,2270 2745.67,2270 2750.51,2274.84 2806.38,2274.84 2865.16,2274.84 3635,1505 4125,1505 4285,1345 ; 2668.58,2038.62 2668.58,1587.63 2721.21,1535 2805,1535 2890,1450 3243.64,1450 3340,1353.64 3376.36,1353.64 3385,1345 ; 2668.58,2491.38 2668.58,2653.58 2702.87,2653.58 2709.29,2660 2740,2690.71 2740,2724.14 2745.86,2730 2945,2730 2965.47,2709.53 2965.47,2650 ; 2688.27,2038.62 2689.13,2039.49 2689.13,2104.13 v1(2690,2105) ; 2688.27,2491.38 2688.27,2530 2710.9,2552.63 2805.47,2552.63 ; 2707.95,2038.62 2707.95,1980.48 2715,1973.43 ; 2707.95,2491.38 2708.86,2490.47 2708.86,2462.42 2716.4,2454.88 2738.88,2454.88 2778.05,2494.05 2818.85,2494.05 3040.94,2494.06 3150,2385 3400,2385 3730,2715 3730,2880 ; 2715,1914.38 2720.91,1914.38 ; 2727.64,2038.62 2727.64,2022.29 2728.54,2021.38 2741.14,2021.38 2789.09,1973.43 2795,1973.43 2795,2056.57 2685.78,2165.78 ; v1(2735,2215) 2735,2171.83 2769.78,2137.05 2806.38,2137.05 ; v1@2745,2313.31 2746.3,2314.61 2805.98,2314.61 2806.38,2314.21 ; v1(2750,1775) 2750,1771.31 2755,1766.31 2755,1679.53 2817.48,1679.53 2819.41,1677.6 ; 2755,1620.47 2756.38,1619.09 2873.62,1619.09 2875,1617.72 ; 2795,1914.38 2800.91,1914.38 ; 2806.38,2117.36 2861.42,2117.36 3585,1393.79 3585,1345 ; 2806.38,2156.73 2807.28,2155.83 2844.17,2155.83 3607.5,1392.5 3637.5,1392.5 3685,1345 ; 2806.38,2176.42 2807.28,2175.51 2848.28,2175.51 3604.39,1419.39 3709.14,1419.39 3783.54,1345 3785,1345 3776.36,1353.64 ; 2806.38,2196.1 2848.9,2196.1 3610,1435 3795,1435 3885,1345 ; 2806.38,2215.79 2853,2215.79 3613.79,1455 3875,1455 3985,1345 ; 2806.38,2235.47 2854.53,2235.47 3615,1475 3955,1475 4085,1345 ; 2806.38,2255.16 2807.28,2254.25 2860.75,2254.25 3625,1490 4040,1490 4185,1345 ; 2806.38,2294.53 2870.47,2294.53 3640,1525 4205,1525 4385,1345 ; 2806.38,2333.9 2861.1,2333.9 3655,1540 4290,1540 4485,1345 ; 2806.38,2353.58 2849.47,2353.58 2853.05,2350 3475,2350 3565,2440 3777.87,2440 3799.33,2461.46 3830.82,2461.46 ; 2806.38,2373.27 2805.47,2374.17 2777.42,2374.17 2769.88,2381.71 2769.88,2423.88 2825.06,2479.06 3032.31,2479.06 3142.99,2368.37 3428.37,2368.37 3670,2610 3829.37,2610 3830.82,2611.46 ; 2806.38,2392.95 2877.52,2392.95 2885,2385.47 2894.53,2395 2899.53,2390 v1(2950,2390) ; 2806.38,2412.64 2844.75,2412.64 2859.98,2427.87 2862.44,2427.87 2877.11,2442.54 2877.11,2445 2882.11,2450 v1(2970,2450) ; 2845,1756.34 2845,1752.4 2852.87,1744.53 2955,1744.53 ; 2870.59,1677.6 2878.46,1685.47 2955,1685.47 2956.52,1686.99 3004.32,1686.99 3011.31,1680 v1(3015,1680) ; 2870.71,2660 2864.53,2653.82 2864.53,2552.63 2866.9,2555 2965.47,2555 ; 2875,1582.28 3027.28,1582.28 v1(3090,1645) ; v1(3215,2305) 3294.04,2225.96 3539.04,2225.96 3620,2145 ; v1(3290,2455) 3340.47,2455 3345.47,2460 ; 3620,1845 4240,1845 4320,1925 4320,2849.14 4320.43,2849.58 4320.43,2870.43 4330,2880 ; 3620,2045 3620,2145 ; 3732.23,2495.54 3748.14,2511.46 3830.82,2511.46 3862.32,2511.46 3887,2486.77 3887,2447 ; v1(3765,2325) 3887,2447 ; 3830,2880 3830,2875.59 4136.06,2569.53 4140,2569.53 4134.54,2564.06 4022.41,2564.06 4019.8,2561.46 ; 3920.47,2382.75 3920.47,2388.65 3887,2422.12 3887,2447 ; 3930,2870 3930,2880 4170.59,2639.41 4170.59,2550.42 4163.05,2542.87 4145.86,2542.87 4140,2537.02 4140,2510.47 4139.51,2510.96 4020.29,2510.96 4019.8,2511.46 ; 4019.8,2461.46 3991.99,2461.46 3979.53,2448.99 3979.53,2382.75 3962.87,2366.09 3962.87,2357.73 3750.15,2145 3620,2145 ; 5057.37,1977.37 5057.37,1979.99 ; 5085,1833.58 5091.89,1833.58 ; 5088.58,1910 5085,1906.42 5083.53,1906.42 5097.12,1920 ; 5130.11,2052.73 5130.11,2065 ; 5154.57,1920 5157.52,1917.05 ; 5160.96,1807.48 5163.92,1807.48 ; 5299.1,1854.58 5309.04,1854.58 ; 5301.62,1920 5309.04,1927.41 5315.93,1927.41 ; 5374.04,1815.43 5394.83,1815.43 ; 5392.38,1893.68 5393.86,1892.2 5394.83,1892.2 ; 5392.38,1970.45 5393.86,1968.98 ; 5393.58,2110 5393.86,2109.72 ; 5393.86,1789.84 5395.33,1791.32 ; 5466.42,1948.58 5510,1905 ; 5510,1878.43 5510,1898.03 ; 5510.97,1905 5510.97,1898.03 5567.98,1841.02 ; 5553.31,1948.31 v2@5553.31,1969.96 ; 5613.58,2023.72 5617.15,2020.16 5627.12,2020.16 ; 5627.12,1994.57 5628.59,1996.04 5652.44,1996.04 5671.73,2015.34 5671.73,2095.31 5686.42,2110 ; 5769.34,2092.2 5795.84,2065.71 5795.84,2047.99 5817.84,2070 ; 5791.62,1917.8 5795.84,1922.01 ; 5940,1693.35 5943.35,1690 ; 6014.25,2037.99 6082.99,2106.73 ; 6257.5,1757.5 6258.82,1756.18
  Top Layer w11.81: 5083.53,1833.58 5090,1827.12 5090,1645 5135,1600 5450.63,1600 ; 5091.89,1833.58 5117.99,1807.48 5160.96,1807.48 ; 5097.12,1920 5154.57,1920 ; 5163.92,1807.48 5196.44,1840 5284.53,1840 5299.1,1854.58 ; 5222.48,1920 5301.62,1920 ; 5232.1,1807.48 5234.58,1805 5325.21,1805 5358.28,1838.07 5371.58,1838.07 5374.53,1841.02 5394.83,1841.02 ; 5305,1711.42 5305,1755 5365,1815 5394.4,1815 5394.83,1815.43 ; 5309.04,1854.58 5346.57,1854.58 5357.14,1865.14 5392.38,1865.14 ; 5315.93,1927.41 5351.13,1892.2 5393.86,1892.2 ; 5529.37,1600 5530,1599.37 5530,1420 5610,1340 6250,1340 6300,1390 6300,1630 6250,1680 6200,1680 6190,1690 ; 5567.98,1841.02 5627.12,1841.02 5627.12,1866.61 ; 5613.58,2023.72 5613.58,2110 ; 5624.2,1789.84 5680,1789.84 ; 5626.14,1892.2 5626.14,1917.8 ; 5626.14,1943.39 5626.14,1994.57 ; 5627.12,1917.8 5791.62,1917.8 ; 5680,1790 5710,1760 5710,1740 ; 5686.42,2110 5726.32,2110 5744.12,2092.2 5769.34,2092.2
  Top Layer w15: 1630,2880 1667.5,2842.5 1667.5,2710.58 1707.5,2670.58 1707.5,2534.95 1698.71,2526.16 1687.5,2526.16 1670,2508.66 1670,2496.46 ; 1730,2880 1692.5,2842.5 1692.5,2720.94 1732.5,2680.94 1732.5,2534.95 1741.29,2526.16 1752.5,2526.16 1770,2508.66 1770,2496.46
  Top Layer w17.72: 5624.2,1815.43 5642.9,1815.43 5653.5,1815.43 5653.94,1815 ; 6258.82,1756.18 6349.37,1756.18
  Top Layer w19.68: 5393.86,2030 5393.86,2109.72 ; 5653.94,1815 5905,1815 5937.79,1782.21 5937.79,1695.56 5940,1693.35 ; 5943.35,1690 6190,1690
  Top Layer w29.53: 5057.37,1979.99 5130.11,2052.73 ; 5130.11,2065 5135.11,2060 5165,2060 5213.15,2011.85 5268.11,2011.85 5275,2004.96 5307.48,2004.96 5360.21,1952.23 5387.23,1952.23 5390,1955 ; 5817.84,2070 6017.99,2070 ; 6190,1690 6257.5,1757.5 6392.01,1892.01 6392.01,2070
  Bottom Layer w10: 1385,1345 1393.64,1353.64 1430,1353.64 1522.22,1445.86 2000.86,1445.86 2046.72,1491.72 2046.72,2281.72 v1(2100,2335) ; 1485,1345 1494.57,1354.57 1529.57,1354.57 1605.86,1430.86 2040.86,1430.86 2086.72,1476.72 v1(2086.72,2265) ; 1585,1345 1593.64,1353.64 1630,1353.64 1683.95,1407.59 2121.73,1407.59 2150,1435.86 v1(2150,2265) ; v1(1920,1760) 1920,1910 v1(2000,1990) ; v1(2080,2705) 2080,2535 2140,2475 2208.19,2406.81 2263.19,2406.81 2400,2270 2676.57,2270 2713.91,2307.35 2737.35,2307.35 v1(2745,2315) 2830,2230 3280,2230 3765,2715 3900,2715 4020.43,2835.43 4020.43,2870.43 4030,2880 ; 2130,2880 2035,2785 2035,2558.79 2201.98,2391.81 2256.98,2391.81 2421.98,2226.81 2627.32,2226.81 3033.19,1820.94 3033.19,1743.89 3041.81,1735.27 3041.81,1668.89 3026.11,1653.19 2871.81,1653.19 v1(2750,1775) ; v1(2150,2700) 2176.81,2726.81 2241.11,2726.81 2283.19,2684.73 2283.19,2538.89 2457.08,2365 v1(2515,2365) 2515,2385 2930,2800 2930,2880 ; 2185,1345 2180,1350 2190,1360 v1(2190,1590) ; v1(2210,2365) 2210,2210 v1(2350,2070) 2455,2070 v1(2510,2125) ; v1(2230,2700) 2230,2570.87 2490.87,2310 v1(2660,2310) ; v1(2250,1601.03) 2250,1380 2285,1345 ; v1(2310,1597.76) 2310,1420 2385,1345 ; v1(2350,1650) 2350,1446.47 2441.9,1354.57 2475.43,1354.57 2485,1345 ; v1(2425,2200) 2632.92,2200 3015,1817.92 v1(3015,1680) ; v1(2460,2400) 2830,2770 2830,2880 ; v1(2485,2790) 2485,2898.64 2521.36,2935 3139.14,2935 3175,2899.14 3175,2725 2970,2520 v1(2970,2450) 3070,2450 3075,2445 v1(3215,2305) 3290,2380 v1(3290,2455) ; v1(2505,2725) 2385,2845 2385,2898.64 2436.36,2950 3223.64,2950 3275,2898.64 v1(3275,2530) ; v1@2625,2430 v1(2630,2430) 2690,2430 3130,2870 3130,2880 3120.43,2870.43 ; v1(2690,2105) 2690,1395.86 2695.86,1390 2703.64,1390 2730,1363.64 2730,1295.86 2735.86,1290 3430,1290 3485,1345 ; v1(2735,2215) 3385,2215 3595,2425 3675,2425 4130,2880 ; v1(3090,1645) 3420,1645 3620,1845 ; 3620,1945 3630,1945 3630,1955 3765,2090 v1(3765,2325)
  other v1: 3060,1755 2865,1875 2215,1985 3655,2510 3155,2530
  other v2: 5464.75,1840.04 5551.37,1840.04 5464.75,1969.96 5551.37,1969.96

## Polygon pours and split planes (outlines as drawn)
no net on Top Layer "NONET_L01_P003" (solid, pour order 3): 5080,2105 5080,2215 5585,2215 5585,1970 5435,1970 5435,2145 5355,2145 5355,2105
no net on Top Layer "NONET_L01_P004" (solid, pour order 4): 5115,1775 5275,1775 5275,1675 5340,1675 5340,1760 5370,1760 5370,1800 5445,1800 5445,1840 5575,1840 5575,1655 5115,1655
no net on Top Layer "NONET_L01_P005" (solid, pour order 5): 5560,1760 5560,1490 5670,1490 5670,1380 6255,1380 6255,1640 5895,1640 5895,1760
no net on Top Layer "NONET_L01_P000" (solid, remove dead copper, pour order 0): 1875,2940 1875,1776.18 1820.55,1776.18 1820.55,1461.22 1875,1461.22 1875,1295 4520,1295 4515,1300 4515,2940
no net on Bottom Layer "NONET_L02_P002" (solid, pour order 2): 4785,2460 4785,1300 6620,1300 6620,2460
no net on Bottom Layer "NONET_L02_P001" (solid, remove dead copper, pour order 1): 1975,2945 1975,1275 4510,1275 4515,1270 4515,2940

## Other copper
Top Layer:
  text "MCU" at 1240,3090 h60
  text "Buck" at 4815,2690 h60

## Silkscreen, mask and mechanical layers (free items; w line width, h text height)
Top Overlay:
  drawing of 34 lines, arcs and shapes, not listed
  text "ISO-SPIN" at 1751.69,2808.31 h35.43 r270
  text "ISO-SPIP" at 1611.69,2803.31 h35.43 r270
  text "CONT N" at 1891.69,2771.69 h35.43
  text "PA5-PA0" at 2576.69,2771.69 h35.43
  text "PC3-PC0" at 3056.69,2771.69 h35.43
  text "PH1/0" at 3531.69,2771.69 h35.43
  text "PC13" at 3721.69,2766.69 h35.43
  text "CAN" at 3896.69,2766.69 h35.43
  text "PA15" at 4091.69,2766.69 h35.43
  text "RESET" at 3335,2765 h35.43
  text "12V" at 4270,2765 h35.43
  text "Gaston Lee" at 6212.87,2387.87 h39.37
  text "2A Max" at 5150,2375 h60
  text "GND" at 3496.69,2343.31 h35.43 r270
  text "Revision 1" at 5152.87,2312.87 h39.37
  text "3.3V" at 3496.69,2168.31 h35.43 r270
  text "-" at 5032.87,2148.2 h39.37
  text "44 Vin" at 4842.87,2102.87 h39.37
  text "+" at 5032.87,2046.31 h39.37
  text "5V" at 3491.69,1978.31 h35.43 r270
  text "PROGRAMMING: / - SWDIO / - SWDCLK / - RESET / - GND / - 3.3V" at 3815,1910 h35.43
  text "12V" at 3491.69,1878.31 h35.43 r270
  text "+" at 6262.87,1671.31 h39.37
  text "12 Vout" at 6317.87,1622.87 h39.37
  text "STM32/LTC6820 Test Board" at 3481.69,1576.69 h39.37
  text "-" at 6262.87,1573.2 h39.37
  text "Alfonso Faria Espinoza" at 3536.69,1519.81 h39.37
  text "BOOT" at 4451.69,1426.69 h35.43
  text "PA6-7" at 1346.69,1421.69 h35.43
  text "PC4-5" at 1546.69,1421.69 h35.43
  text "PB1-2" at 1766.69,1421.69 h35.43
  text "PB10-11" at 1956.69,1421.69 h35.43
  text "SPI" at 2256.69,1421.69 h35.43
  text "PB3-6" at 4141.69,1421.69 h35.43
  text "PC6-9" at 2631.69,1416.69 h35.43
  text "PA8-12" at 3031.69,1416.69 h35.43
  text "SWDIO" at 3311.69,1416.69 h35.43
  text "SWDCLK" at 3491.69,1416.69 h35.43
  text "PC10-12" at 3711.69,1416.69 h35.43
  text "PD2" at 3956.69,1416.69 h35.43
Bottom Overlay:
  drawing of 61 lines, arcs and shapes, not listed
Mechanical 1:
  lines w1: 1229.5,1225 ccw(c1230,1225) 1230,1224.5 ; 1229.5,1225 ccw(c1230,1225) 1230,1224.5 ; 1229.5,1225 1229.5,2970 ; 1229.5,2970 cw(c1230,2970) 1230,2970.5 ; 1229.5,2970 cw(c1230,2970) 1230,2970.5 ; 1230,1224.5 4625,1224.5 ; 1230,2970.5 2845,2970.5 4625,2970.5 ; 4625,1224.5 ccw(c4625,1225) 4625.5,1225 ; 4625,1224.5 ccw(c4625,1225) 4625.5,1225 ; 4625,2970.5 cw(c4625,2970) 4625.5,2970 ; 4625,2970.5 cw(c4625,2970) 4625.5,2970 ; 4625.5,1225 4625.5,2970
  lines w47.24: 4705,1230 4705,2550 6705,2550 6705,1230 4705,1230